# EAGLE board MEMS_ADC_Z (EAGLE 6.1)
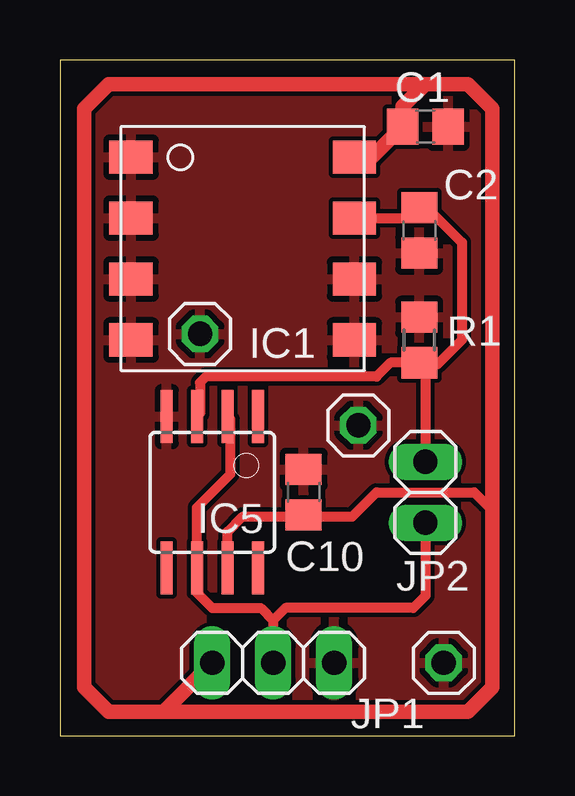
[diagram p0: board, top side]
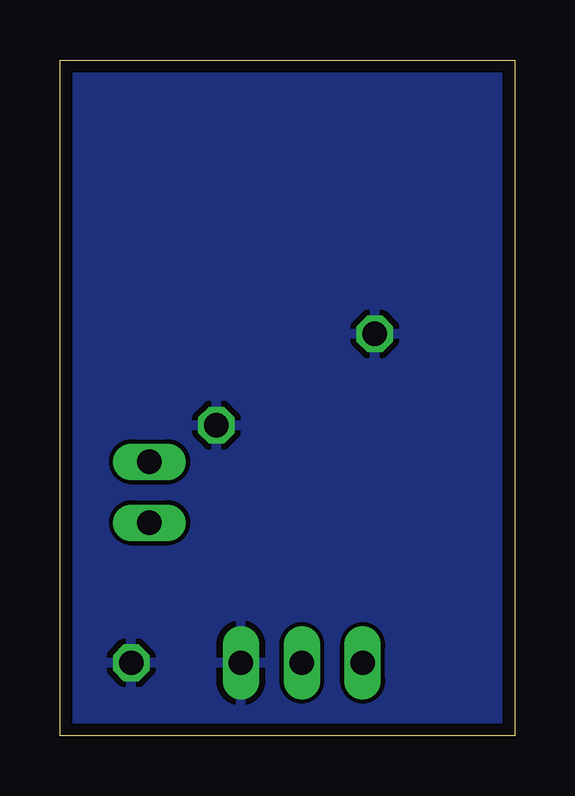
[diagram p1: board, bottom side, seen from below]

Size 18.97 x 28.18 mm. Coordinates in mm from the lower left corner, seen from the top.
Outline: 0,0 18.97,0 18.97,28.18 0,28.18 0,0
Copper layers (1*16): Top 0.0356mm / dielectric 1.5011mm / Bottom 0.0356mm
Design rules: minimum track width 7mil, minimum drill 14mil, track to track 7mil, track to pad 7mil, pad to pad 7mil, via to via 7mil, smd to smd 0mil, copper to edge 20mil, drill to drill 8mil, minimum pad ring 10mil, minimum via ring 8mil, stop-mask expansion 4mil, vias tented up to drill 0mil, thermal gap 10mil

## Footprints (pad centres in the part's own frame; a part is rotated, then mirrored left to right if it is on the bottom)
C0805 = smd 1.3 x 1.5: 1 -0.95,0; 2 0.95,0
SCA610-D14H1 = smd 1.81 x 1.39: P$1 -4.66,3.81; P$2 -4.66,1.27; P$3 -4.66,-1.27; P$4 -4.66,-3.81; P$5 4.66,-3.81; P$6 4.66,-1.27; P$7 4.66,1.27; P$8 4.66,3.81
SOIC8 = smd 0.5 x 2.2: 1 -1.905,-3.154; 2 -0.645,-3.154; 3 0.625,-3.154; 4 1.895,-3.154; 5 1.905,3.154; 6 0.635,3.154; 7 -0.635,3.154; 8 -1.905,3.154
1X03 = drill 1.016 long: 1 -2.54,0; 2 0,0; 3 2.54,0
1X02 = drill 1.016 long: 1 -1.27,0; 2 1.27,0
1X01 = drill 1.016 octagon: 1 0,0
R0805 = smd 1.3 x 1.5: 1 -0.95,0; 2 0.95,0

## Placement (x,y rotation side)
C1  20nF  [C0805]  15.24,25.4 0 top
C2  20nF  [C0805]  14.99,21.08 270 top
C10  0.1uF  [C0805]  10.16,10.16 90 top
IC1  SCA610  [SCA610-D14H1]  7.62,20.32 0 top
IC5  AD8655  [SOIC8]  6.35,10.16 180 top
JP1  [1X03]  8.89,3.05 0 top
JP2  [1X02]  15.24,10.16 90 top
JP3  [1X01]  5.84,16.76 0 top
JP4  [1X01]  12.45,12.95 0 top
JP5  [1X01]  16,3.05 0 top
R1  20k  [R0805]  14.99,16.51 270 top

## Library data of the parts
C1 C2 C10 R1 = rcl
IC1 IC5 = OpenEQ
JP1-JP5 = pinhead

## Nets
GND: C1.2 C2.2 C10.2 IC1.P$1 IC1.P$2 IC1.P$3 IC1.P$4 IC1.P$5 IC1.P$6 IC5.4 JP1.3 JP3.1 JP4.1 JP5.1 R1.1
N$9: C2.1 IC1.P$7 IC5.3 JP2.2 R1.2
N$13: IC5.2 IC5.6 JP1.2 JP2.1
VCC: C1.1 C10.1 IC1.P$8 IC5.7 JP1.1

## Tracks (layer width: path | path; a pad name or v marks a point on that pad's centre or on a via)
GND
  pour Top: -0.25,28.19 19.05,28.19 19.05,-0.25 -0.25,-0.25
  pour Bottom: -0.25,28.19 19.05,28.19 19.05,-0.25 -0.25,-0.25
N$9
  Top 0.406: IC1.P$7 14.54,21.59 C2.1 15.31,22.03 16.76,20.57 16.76,16.51 15.75,15.49 15.05,15.49 | 15.05,15.49 R1.2 13.78,15.56 13.21,14.99 6.1,14.99 5.84,14.73 5.84,13.43 IC5.3 | 15.05,15.49 15.05,15.43 15.24,15.24 JP2.2
N$13
  Top 0.406: IC5.2 7.11,13.2 7.11,10.92 5.71,9.53 IC5.6 5.71,5.97 6.35,5.33 8.38,5.33 8.89,4.83 | 8.89,4.83 JP1.2 | JP2.1 15.24,5.84 14.73,5.33 9.4,5.33 8.89,4.83
VCC
  Top 0.406: 10.09,9.14 7.62,9.14 6.99,8.51 IC5.7 | 10.09,9.14 C10.1 | 10.09,9.14 12.19,9.14 13.21,10.16 17.27,10.16 18.03,9.4
  Top 0.61: JP1.1 4.32,1.02 | 4.32,1.02 2.03,1.02 1.02,2.03 1.02,26.16 2.03,27.18 15.24,27.18 | 15.24,27.18 17.02,27.18 18.03,26.16 18.03,9.4 18.03,2.03 17.02,1.02 4.32,1.02 | IC1.P$8 13.02,24.13 C1.1 14.29,26.23 15.24,27.18